# Altium PCB QI9-2605-A01.PcbDoc
Units mm, origin at the board's own origin, x right, y up, seen from the top; angles counter-clockwise.
Board outline 152.4 x 101.6 mm, 2 copper layers (Top Layer, Bottom Layer); 196 components, 142 nets, 676 pads, 0 vias.
Unrouted connection lines stored in the file: 467.
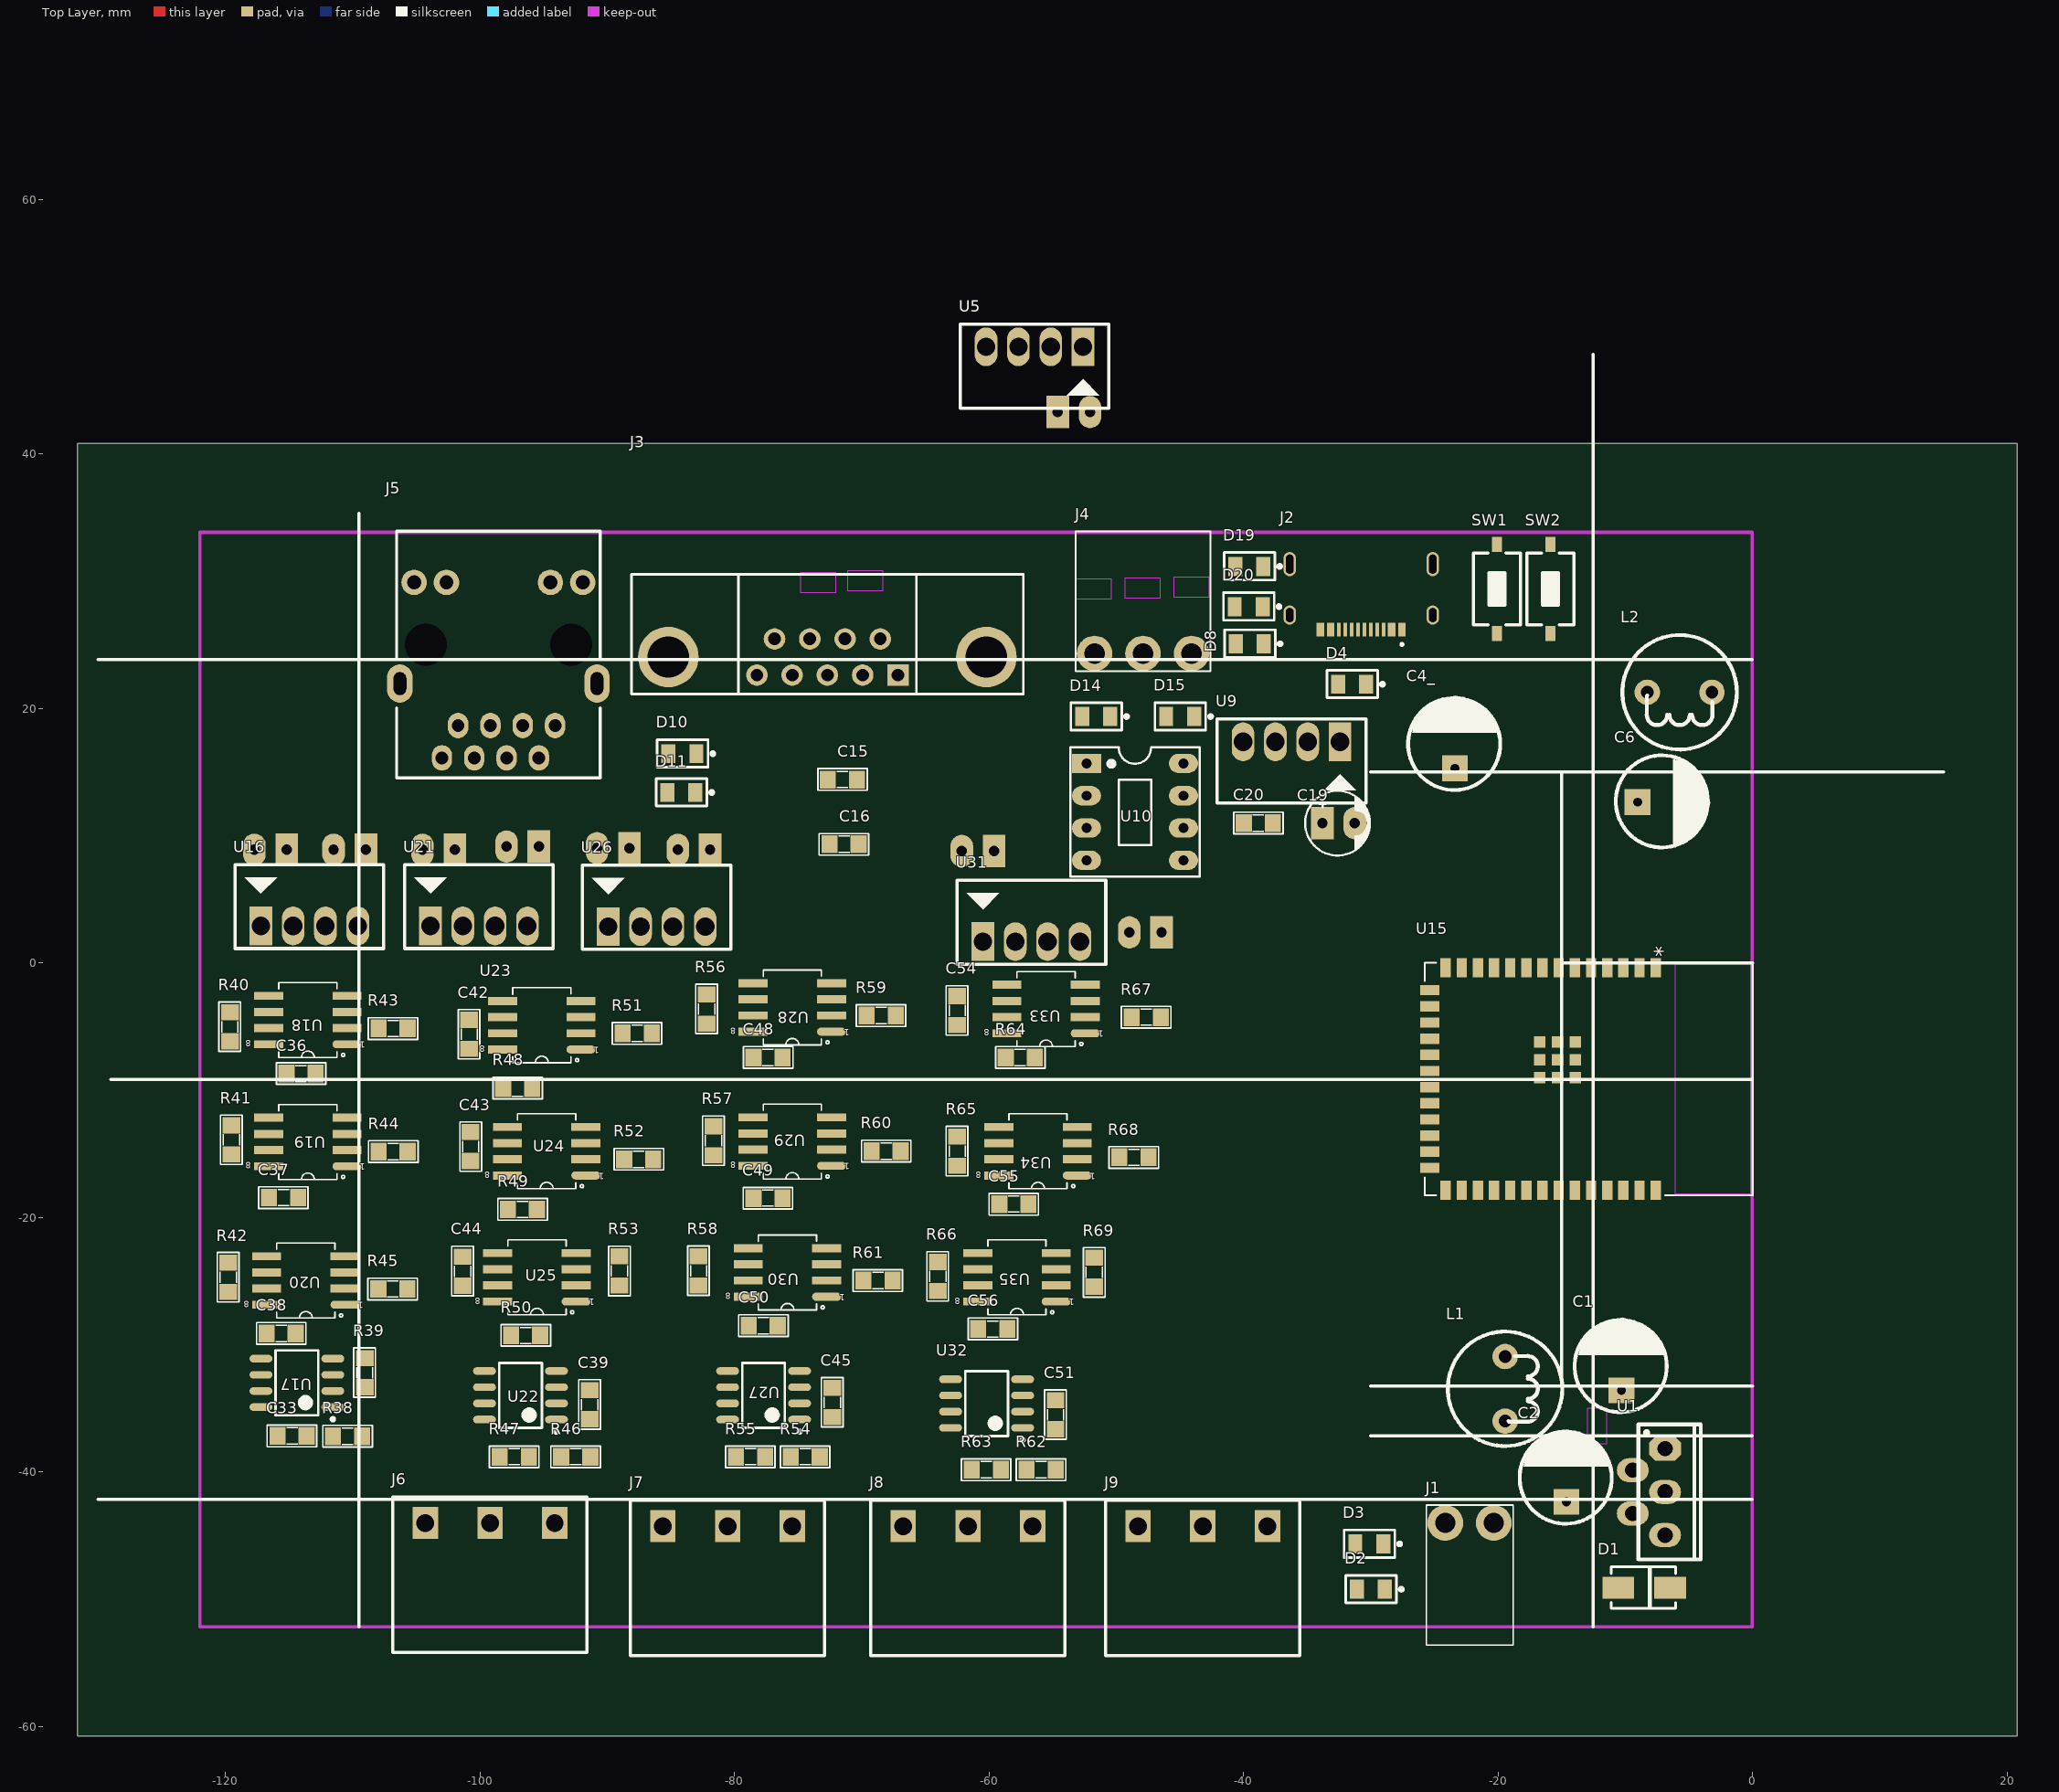
[diagram p0: Top Layer view]
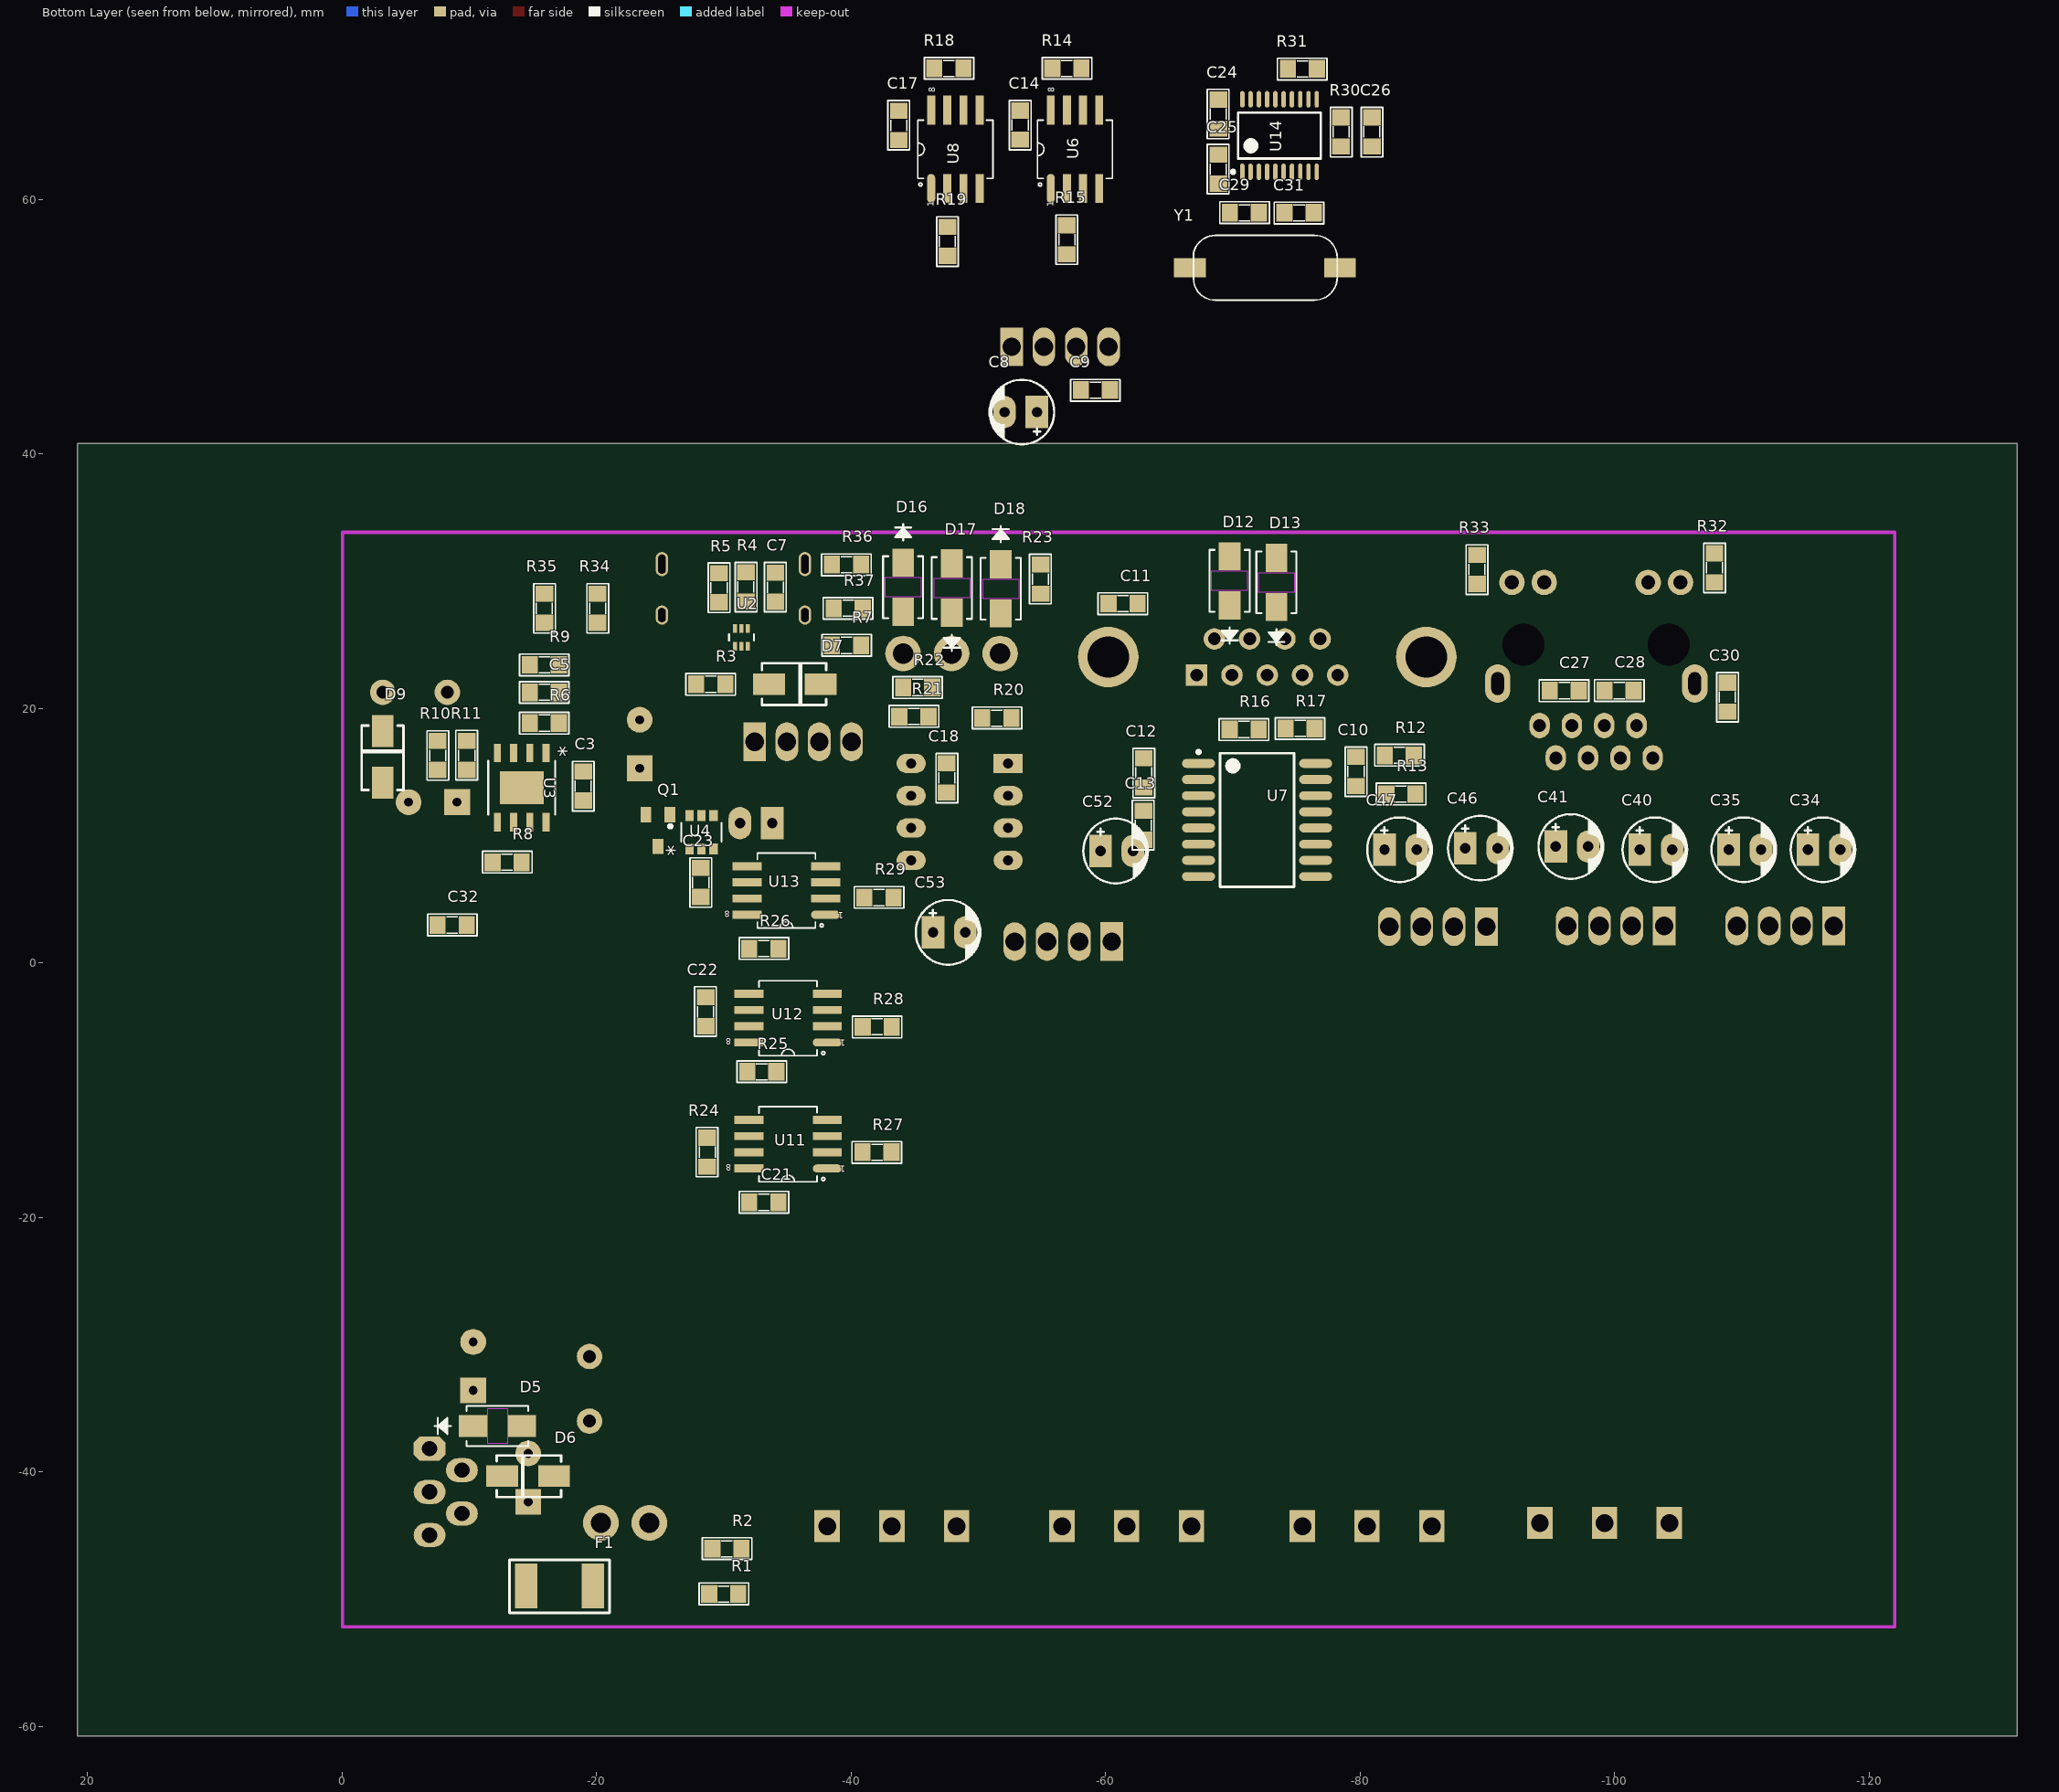
[diagram p1: Bottom Layer view, seen from below]

## Layer stack, top to bottom
Top Solder: solder mask 0.0102, Solder Resist, Dk 3.5
Top Layer: signal copper 0.0356
Dielectric 1: dielectric 0.32, FR-4, Dk 4.8
Bottom Layer: signal copper 0.0356
Bottom Solder: solder mask 0.0102, Solder Resist, Dk 3.5

## Board outline
-131.621,-60.763 20.779,-60.763 20.779,40.837 -131.621,40.837

## Design rules (kind name [scope] priority, off if disabled: settings)
Clearance [All] p1: gap=0.254 ignorepadtopadclearanceinfootprint=FALSE
PolygonConnect [All] p1: connectstyle=Relief reliefconductorwidth=0.254 reliefentries=4 polygonreliefangle="90 Angle" airgapwidth=0.254
RoutingVias [All] p1: holewidth=0.711 width=1.27 viastyle="Through Hole" minholewidth=0.711 minwidth=1.27 maxholewidth=0.711 maxwidth=1.27
SolderMaskExpansion [All] p1: expansion=0 istentingtop=FALSE
SupplyNets "Schematic Supply Nets_17" [InNet('VBUS')] p1: voltage=0.000
SupplyNets "Schematic Supply Nets_16" [InNet('GND2')] p2: voltage=0.000
SupplyNets "Schematic Supply Nets_15" [InNet('GND_RS232')] p3: voltage=0.000
SupplyNets "Schematic Supply Nets_14" [InNet('GND1')] p4: voltage=0.000
SupplyNets "Schematic Supply Nets_13" [InNet('5VP')] p5: voltage=0.000
SupplyNets "Schematic Supply Nets_12" [InNet('VCC1')] p6: voltage=0.000
SupplyNets "Schematic Supply Nets_11" [InNet('GND3')] p7: voltage=0.000
SupplyNets "Schematic Supply Nets_10" [InNet('5V_RS232')] p8: voltage=0.000
SupplyNets "Schematic Supply Nets_9" [InNet('GND_RS485')] p9: voltage=0.000
SupplyNets "Schematic Supply Nets_8" [InNet('VCC2')] p10: voltage=0.000
SupplyNets "Schematic Supply Nets_7" [InNet('3.3V')] p11: voltage=0.000
SupplyNets "Schematic Supply Nets_6" [InNet('GND4')] p12: voltage=0.000
SupplyNets "Schematic Supply Nets_5" [InNet('GND')] p13: voltage=0.000
SupplyNets "Schematic Supply Nets_4" [InNet('VCC3')] p14: voltage=0.000
SupplyNets "Schematic Supply Nets_3" [InNet('VCC4')] p15: voltage=0.000
SupplyNets "Schematic Supply Nets_2" [InNet('5V_RS485')] p16: voltage=0.000
SupplyNets "Schematic Supply Nets_1" [InNet('5V')] p17: voltage=0.000
SupplyNets "Schematic Supply Nets" [InNet('24V')] p18: voltage=0.000
Width [All] p1: maxlimit=0.254 minlimit=0.254 preferedwidth=0.254
30 further rules are at their usual default settings.

## Components (designator, comment, footprint, x,y, rotation, side; value= is the part's Value field where it differs from the comment)
C1 "Cap2" C2 -10.308,-33.6 r180 top value=220uF/50V
C2 "" c2 -14.626,-42.363 r180 top value=220uF,16V
C3 "Cap" 0805 -18.944,13.898 r90 bottom value=104
C4_ "Cap2" C2 -23.389,15.295 r180 top value=220uF/50V
C5 "Cap" 0805 -15.896,21.264 r180 bottom value=220
C6 "Cap2" C2 -9.038,12.628 r90 top value=220uF/50V
C7 "Cap" 0805 -34.057,29.519 r270 bottom value=4.7nF
C8 "Cap" CP1/2 -54.603,43.285 r0 bottom value=4.7uF
C9 "Cap" 0805 -59.203,45.013 r180 bottom value=22uF
C10 "Cap" 0805 -79.67,15.037 r90 bottom value=104
C11 "Cap" 0805 -61.369,28.233 r180 bottom value=4.7nF
C12 "Cap" 0805 -62.999,14.926 r90 bottom value=22uF
C13 "Cap" 0805 -62.972,10.816 r270 bottom value=22uF
C14 "Cap" 0805 -53.285,65.841 r90 bottom value=104
C15 "Cap" 0805 -71.522,14.406 r180 top value=22uF
C16 "Cap" 0805 -71.395,9.326 r0 top value=22uF
C17 "Cap" 0805 -43.75,65.815 r270 bottom value=104
C18 "Cap" 0805 -47.519,14.533 r90 bottom value=104
C19 "Cap" CP1/2 -33.803,10.977 r0 top value=4.7uF
C20 "Cap" 0805 -38.841,10.977 r180 top value=22uF
C21 "Cap" 0805 -33.143,-18.823 r0 bottom value=104
C22 "Cap" 0805 -28.571,-3.837 r270 bottom value=104
C23 "Cap" 0805 -28.19,6.323 r90 bottom value=104
C24 "Cap" 0805 -68.855,66.692 r270 bottom value=104
C25 "Cap" 0805 -68.855,62.374 r270 bottom value=104
C26 "Cap" 0805 -80.92,65.295 r90 bottom value=104
C27 "Cap" 0805 -96.033,21.391 r180 bottom value=1nF
C28 "Cap" 0805 -100.351,21.391 r0 bottom value=1nF
C29 "Cap" 0805 -70.907,58.945 r0 bottom value=22pF
C30 "Cap" 0805 -108.86,20.883 r90 bottom value=4.7nF
C31 "Cap" 0805 -75.205,58.945 r180 bottom value=22pF
C32 "Cap" 0805 -8.657,2.976 r0 bottom value=104
C33 "Cap" 0805 -114.769,-37.165 r0 top value=104
C34 "Cap" CP1/2 -115.189,8.89 r180 bottom value=4.7uF
C35 "Cap" CP1/2 -108.966,8.89 r180 bottom value=10uF
C36 "Cap" 0805 -114.067,-8.708 r180 top value=104
C37 "Cap" 0805 -115.439,-18.445 r0 top value=104
C38 "Cap" 0805 -115.631,-29.123 r180 top value=104
C39 "Cap" 0805 -91.385,-34.717 r270 top value=104
C40 "Cap" CP1/2 -101.981,8.89 r180 bottom value=4.7uF
C41 "Cap" CP1/2 -95.377,9.144 r180 bottom value=10uF
C42 "Cap" 0805 -100.85,-5.62 r270 top value=104
C43 "Cap" 0805 -100.742,-14.427 r90 top value=104
C44 "Cap" 0805 -101.364,-24.228 r270 top value=104
C45 "Cap" 0805 -72.317,-34.547 r270 top value=104
C46 "Cap" CP1/2 -88.265,9.017 r180 bottom value=4.7uF
C47 "Cap" CP1/2 -81.915,8.89 r180 bottom value=10uF
C48 "Cap" 0805 -77.364,-7.438 r180 top value=104
C49 "Cap" 0805 -77.364,-18.487 r0 top value=104
C50 "Cap" 0805 -77.745,-28.52 r180 top value=104
C51 "Cap" 0805 -54.774,-35.507 r270 top value=104
C52 "Cap" CP1/2 -59.603,8.789 r180 bottom value=4.7uF
C53 "Cap" CP1/2 -46.442,2.395 r180 bottom value=10uF
C54 "Cap" 0805 -62.505,-3.755 r270 top value=104
C55 "Cap" 0805 -58.05,-18.957 r0 top value=104
C56 "Cap" 0805 -59.711,-28.774 r180 top value=104
D1 "1N5822" DIODE_DO214AC_SMA -8.517,-49.104 r0 top
D2 "LED" LED_0805_RED -29.993,-49.221 r0 top
D3 "LED" LED_0805_RED -30.12,-45.665 r0 top
D4 "LED" LED_0805_RED -31.474,21.899 r0 top
D5 "SMAJ30CA" SMA_STM -12.213,-36.394 r180 bottom value=SMAJ30A
D6 "1N5822" DIODE_DO214AC_SMA -14.626,-40.331 r0 bottom
D7 "1N5822" DIODE_DO214AC_SMA -35.581,21.899 r180 bottom
D8 "LED" LED_0805_RED -39.518,25.074 r0 top
D9 "1N5822" DIODE_DO214AC_SMA -3.196,16.184 r90 bottom
D10 "LED" LED_0805_RED -84.095,16.438 r0 top
D11 "LED" LED_0805_RED -84.179,13.39 r0 top
D12 "SMAJ15CA" SMA_STM -69.744,30.027 r90 bottom value=SMAJ30A
D13 "SMAJ15CA" SMA_STM -73.427,29.9 r90 bottom value=SMAJ30A
D14 "LED" LED_0805_RED -51.583,19.359 r0 top
D15 "LED" LED_0805_RED -44.979,19.359 r0 top
D16 "SMAJ9CA" SMA_STM -44.09,29.522 r270 bottom value=SMAJ30A
D17 "SMAJ9CA" SMA_STM -47.921,29.456 r90 bottom value=SMAJ30A
D18 "SMAJ9CA" SMA_STM -51.765,29.392 r270 bottom value=SMAJ30A
D19 "LED" LED_0805_RED -39.552,31.154 r0 top
D20 "LED" LED_0805_RED -39.602,27.995 r0 top
F1 "3A" FUSE_1812(4532) -17.091,-48.967 r0 bottom
J1 "KF-3.810-2R" KF2-3.81 -24.151,-44.014 r0 top
J2 "UJ20-C-H-G-MSMT-4-P16-TR" UJ20-C-H-G-MSMT-4-P16 -30.755,28.757 r180 top
J3 "D Connector 9" DSUB1.385-2H9 -72.701,24.035 r270 top
J4 "KF-3.81-3R" KF3-3.81 -44.09,24.312 r180 top
J5 "HR911105A" HR911105A -98.552,25 r0 top
J6 "2EDG5.08-3P" "CON 3 3EDG5.08" -94.128,-44.014 r180 top
J7 "2EDG5.08-3P" "CON 3 3EDG5.08" -75.459,-44.268 r180 top
J8 "2EDG5.08-3P" "CON 3 3EDG5.08" -56.574,-44.268 r180 top
J9 "2EDG5.08-3P" "CON 3 3EDG5.08" -38.121,-44.268 r180 top
L1 "Inductor" L1A -19.452,-30.933 r270 top value=33uH
L2 "Inductor" L1A -3.196,21.264 r180 top value=10uH
Q1 "A0347A" SOT23_ -24.818,10.395 r0 bottom
R1 "Res1" SM-RES-0805 -31.136,-49.602 r0 bottom value=2K2
R2 "Res1" SM-RES-0805 -31.39,-46.046 r0 bottom value=330
R3 "Res1" SM-RES-0805 -27.834,21.899 r180 bottom value=360
R4 "Res1" SM-RES-0805 -31.732,28.401 r90 bottom value=5K1
R5 "Res1" SM-RES-0805 -29.62,28.347 r90 bottom value=5K1
R6 "Res1" SM-RES-0805 -14.753,18.851 r180 bottom value=5K1
R7 "Res1" SM-RES-0805 -40.788,24.947 r0 bottom value=360
R8 "Res1" SM-RES-0805 -14.118,7.901 r0 bottom value=200K
R9 "Res1" SM-RES-0805 -14.753,23.423 r180 bottom value=68K
R10 "Res1" SM-RES-0805 -7.514,15.168 r90 bottom value=5K1
R11 "Res1" SM-RES-0805 -9.8,17.454 r270 bottom value=1K6
R12 "Res1" SM-RES-0805 -84.222,16.311 r0 bottom value=360
R13 "Res1" SM-RES-0805 -84.349,13.263 r0 bottom value=360
R14 "Res1" SM-RES-0805 -58.102,70.286 r0 bottom value=5k1
R15 "Res1" SM-RES-0805 -56.959,57.967 r270 bottom value=220
R16 "Res1" SM-RES-0805 -69.744,18.343 r180 bottom value=0
R17 "Res1" SM-RES-0805 -74.146,18.425 r180 bottom value=0
R18 "Res1" SM-RES-0805 -48.831,70.286 r0 bottom value=5k1
R19 "Res1" SM-RES-0805 -47.561,55.554 r90 bottom value=360
R20 "Res1" SM-RES-0805 -52.599,19.232 r0 bottom value=360
R21 "Res1" SM-RES-0805 -46.079,19.359 r0 bottom value=360
R22 "Res1" SM-RES-0805 -44.09,21.645 r180 bottom value=0
R23 "Res1" SM-RES-0805 -54.885,31.297 r270 bottom value=0
R24 "Res1" SM-RES-0805 -28.698,-13.743 r270 bottom value=5k1
R25 "Res1" SM-RES-0805 -34.123,-8.566 r0 bottom value=5k1
R26 "Res1" SM-RES-0805 -34.286,1.116 r0 bottom value=5k1
R27 "Res1" SM-RES-0805 -40.89,-14.886 r180 bottom value=220
R28 "Res1" SM-RES-0805 -40.915,-5.025 r180 bottom value=220
R29 "Res1" SM-RES-0805 -43.328,5.135 r0 bottom value=360
R30 "Res1" SM-RES-0805 -78.507,64.152 r90 bottom value=0
R31 "Res1" SM-RES-0805 -74.316,70.248 r180 bottom value=5K1
R32 "Res1" SM-RES-0805 -107.844,29.9 r90 bottom value=220
R33 "Res1" SM-RES-0805 -89.175,29.773 r90 bottom value=220
R34 "Res1" SM-RES-0805 -20.087,26.725 r90 bottom value=5k1
R35 "Res1" SM-RES-0805 -15.896,26.725 r90 bottom value=5k1
R36 "Res1" SM-RES-0805 -38.502,31.297 r180 bottom value=220
R37 "Res1" SM-RES-0805 -38.629,27.868 r180 bottom value=220
R38 "Res1" SM-RES-0805 -109.271,-37.203 r180 top value=5k1
R39 "Res1" SM-RES-0805 -109.058,-31.061 r270 top value=5k1
R40 "Res1" SM-RES-0805 -119.655,-3.882 r270 top value=5k1
R41 "Res1" SM-RES-0805 -119.528,-12.772 r270 top value=5k1
R42 "Res1" SM-RES-0805 -119.782,-23.567 r270 top value=5k1
R43 "Res1" SM-RES-0805 -107.971,-5.152 r0 top value=360
R44 "Res1" SM-RES-0805 -105.685,-14.838 r180 top value=360
R45 "Res1" SM-RES-0805 -107.993,-25.624 r0 top value=360
R46 "Res1" SM-RES-0805 -93.62,-38.807 r0 top value=5k1
R47 "Res1" SM-RES-0805 -98.446,-38.807 r0 top value=5k1
R48 "Res1" SM-RES-0805 -95.906,-9.851 r180 top value=5k1
R49 "Res1" SM-RES-0805 -95.525,-19.376 r180 top value=5k1
R50 "Res1" SM-RES-0805 -95.271,-29.282 r180 top value=5k1
R51 "Res1" SM-RES-0805 -88.794,-5.533 r0 top value=360
R52 "Res1" SM-RES-0805 -86.381,-15.439 r180 top value=360
R53 "Res1" SM-RES-0805 -89.048,-25.345 r90 top value=360
R54 "Res1" SM-RES-0805 -75.586,-38.807 r0 top value=5k1
R55 "Res1" SM-RES-0805 -79.889,-38.807 r0 top value=5k1
R56 "Res1" SM-RES-0805 -82.19,-2.485 r270 top value=5k1
R57 "Res1" SM-RES-0805 -81.649,-12.845 r270 top value=5k1
R58 "Res1" SM-RES-0805 -82.825,-23.059 r270 top value=5k1
R59 "Res1" SM-RES-0805 -69.617,-4.136 r0 top value=360
R60 "Res1" SM-RES-0805 -66.95,-14.804 r180 top value=360
R61 "Res1" SM-RES-0805 -69.871,-24.964 r0 top value=360
R62 "Res1" SM-RES-0805 -57.044,-39.823 r0 top value=5k1
R63 "Res1" SM-RES-0805 -61.362,-39.823 r0 top value=5k1
R64 "Res1" SM-RES-0805 -56.409,-7.438 r180 top value=5k1
R65 "Res1" SM-RES-0805 -62.505,-13.661 r270 top value=5k1
R66 "Res1" SM-RES-0805 -64.025,-23.504 r270 top value=5k1
R67 "Res1" SM-RES-0805 -48.789,-4.263 r0 top value=360
R68 "Res1" SM-RES-0805 -49.759,-15.279 r0 top value=360
R69 "Res1" SM-RES-0805 -51.746,-25.452 r90 top value=360
SW1 "SW-SMD" SW-SMD -20.087,29.392 r270 top
SW2 "SW-SMD" SW-SMD -15.896,29.392 r90 top
U1 "LM2576HVT-5.0" T05 -6.879,-38.172 r270 top
U2 "USBLC6-2P6" SOT-666_STM -31.39,25.582 r270 bottom
U3 "MP1584EN-LF-Z" SOIC8E_MPS -14.118,13.771 r270 bottom
U4 "LTC4412ES6#TRMPBF" SOT-6_S_LIT -28.247,10.268 r90 bottom
U5 "B0505S" B0505S -52.614,48.414 r180 top
U6 "HCPL-0600" SOIC8_50_328_25X90_SMT -57.594,63.936 r90 bottom
U7 "SP232" soic16_m -71.903,11.231 r180 bottom
U8 "HCPL-0600" SOIC8_50_328_25X90_SMT -48.196,63.936 r90 bottom
U9 "B0505S" B0505S -32.419,17.375 r180 top
U10 "MAX485" DIP8 -48.535,11.993 r270 top
U11 "HCPL-0600" SOIC8_50_328_25X90_SMT -35.048,-14.251 r0 bottom
U12 "HCPL-0600" SOIC8_50_328_25X90_SMT -35.048,-4.345 r0 bottom
U13 "HCPL-0600" SOIC8_50_328_25X90_SMT -34.921,5.688 r0 bottom
U14 "CH9121t" tssop20 -73.666,65.013 r90 bottom
U15 "ESP32-S3-WROOM-1-N8" ESP32-S3-WROOM-1_EXP -12.878,-9.131 r270 top
U16 "B0505S" B0505S -117.225,2.902 r0 top
U17 "MCP3201" SO8 -114.389,-33.009 r180 top
U18 "HCPL-0600" SOIC8_50_328_25X90_SMT -113.525,-4.492 r180 top
U19 "HCPL-0600" SOIC8_50_328_25X90_SMT -113.525,-14.076 r180 top
U20 "HCPL-0600" SOIC8_50_328_25X90_SMT -113.686,-24.964 r180 top
U21 "B0505S" B0505S -103.892,2.902 r0 top
U22 "MCP3201" SO8 -96.816,-33.984 r180 top
U23 "HCPL-0600" SOIC8_50_328_25X90_SMT -95.144,-4.898 r180 top
U24 "HCPL-0600" SOIC8_50_328_25X90_SMT -94.763,-14.804 r180 top
U25 "HCPL-0600" SOIC8_50_328_25X90_SMT -95.525,-24.71 r180 top
U26 "B0505S" B0505S -89.922,2.849 r0 top
U27 "MCP3201" SO8 -77.717,-33.984 r180 top
U28 "HCPL-0600" SOIC8_50_328_25X90_SMT -75.459,-3.501 r180 top
U29 "HCPL-0600" SOIC8_50_328_25X90_SMT -75.459,-14.042 r180 top
U30 "HCPL-0600" SOIC8_50_328_25X90_SMT -75.84,-24.329 r180 top
U31 "B0505S" B0505S -60.478,1.671 r0 top
U32 "MCP3201" SO8 -60.191,-34.631 r180 top
U33 "HCPL-0600" SOIC8_50_328_25X90_SMT -55.52,-3.628 r180 top
U34 "HCPL-0600" SOIC8_50_328_25X90_SMT -56.155,-14.804 r180 top
U35 "HCPL-0600" SOIC8_50_328_25X90_SMT -57.806,-24.71 r180 top
Y1 "25 MHZ" Crystal.smd_N -70.125,54.627 r90 bottom

## Footprints (in the part's own frame and the unit in brackets; to place one, negate y for a bottom-side part, rotate by r counter-clockwise, add the part's x,y. Pads: shape width x height; smd on the part's side, far side on the other; paste and mask are expansions set on the pad)
0805 [mil] "Compoment SMD 80x50mil"
  rect 50x55 smd: 1(-45,0) 2(45,0)
  silkscreen extent -77,-34 76,33, body extent -40,-27 40,23, height 24
B0505S [mil]
  rect 70x120 hole 57: 1(0,0)
  oval 70x120 hole 57: 2(100,0) 3(200,0) 4(300,0)
  silkscreen extent -80,-70 380,190, body extent -76,-50 376,186, height 394
C2 [mil]
  rect 80x80 hole 27.56: 1(0,0)
  round 80 hole 27.56: 2(0,-150)
  silkscreen extent -140,-225 145,67
c2 [mil]
  rect 80x80 hole 27.56: 1(0,0)
  round 80 hole 27.56: 2(0,-150)
  silkscreen extent -140,-225 145,67
"CON 3 3EDG5.08" [mm]
  rect 2x2.5 hole 1.4: 1(0,0) 2(5.08,0) 3(10.173,0)
  silkscreen extent -2.54,-2.03 12.71,10.16, body extent -2.5,-1.75 12.67,10.25, height 3.15
CP1/2 [mil] "Tu hoa < 22uF/16>50V"
  rect 70x100 hole 32: 1(0,0)
  oval 70x100 hole 32: 2(100,0)
  silkscreen extent -53,-100 147,100, body extent -49,-99 149,99, height 287
Crystal.smd_N [mm] "HC49USxx package"
  rect 1.5x2.5 smd: 1(0,3.5) 2(0,-8.3)
  silkscreen extent -2.55,-8.08 2.55,3.22, body extent -2.29,-8.11 2.36,3.24, height 4
DIODE_DO214AC_SMA [mm] "Diode 2214AC- SMA type"
  rect 2.5x1.7 smd: 1(-2.032,0) 2(2.032,0)
  silkscreen extent -2.59,-1.63 2.46,1.7, body extent -2.53,-1.35 2.47,1.35, height 2.25
DIP8 [mil] "DIP, 8-Leads, Row Spacing 7.62mm, Pitch 2.54mm, Body 9.91x6.73mm"
  rect 60x90 hole 31: 1(-145,-150)
  oval 60x90 hole 31: 2(-45,-150) 3(55,-150) 4(155,-150) 5(155,150) 6(55,150) 7(-45,150) 8(-145,150)
  silkscreen extent -195,-200 205,200, body extent -213,-153 213,153, height 177
DSUB1.385-2H9 [mm] "Connector; D Subminiature; 9 Position; Right Angle; Pitch 1.385 mm"
  rect 1.69x1.69 hole 1: 1(1.42,5.54)
  round 1.69 hole 1: 2(1.42,2.77) 3(1.42,0) 4(1.42,-2.77) 5(1.42,-5.54) 6(-1.42,4.155) 7(-1.42,1.385) 8(-1.42,-1.385) 9(-1.42,-4.155)
  round 4.76 hole 3.26: 10(0,-12.495) 11(0,12.495)
  silkscreen extent -6.5,-15.4 2.9,15.4, body extent -15.62,-15.43 3.58,15.38, height 12.52
ESP32-S3-WROOM-1_EXP [mil]
  rect 59x32 smd paste+0 mask+0: 1(-344.49,207.09) 2(-344.49,157.09) 3(-344.49,107.09) 4(-344.49,57.09) 5(-344.49,7.09) 6(-344.49,-42.91) 7(-344.49,-92.91) 8(-344.49,-142.91) 9(-344.49,-192.91) 10(-344.49,-242.91) 11(-344.49,-292.91) 12(-344.49,-342.91) 13(-344.49,-392.91) 14(-344.49,-442.91) 27(344.49,-442.91) 28(344.49,-392.91) 29(344.49,-342.91) 30(344.49,-292.91) 31(344.49,-242.91) 32(344.49,-192.91) 33(344.49,-142.91) 34(344.49,-92.91) 35(344.49,-42.91) 36(344.49,7.09) 37(344.49,57.09) 38(344.49,107.09) 39(344.49,157.09) 40(344.49,207.09)
  rect 32x59 smd paste+0 mask+0: 15(-275,-492.13) 16(-225,-492.13) 17(-175,-492.13) 18(-125,-492.13) 19(-75,-492.13) 20(-25,-492.13) 21(25,-492.13) 22(75,-492.13) 23(125,-492.13) 24(175,-492.13) 25(225,-492.13) 26(275,-492.13)
  rect 35x35 smd paste+0 mask+0: 41(-59.06,-96.85) 42(-114.17,-41.73) 43(-114.17,-96.85) 44(-114.17,-151.97) 45(-59.06,-151.97) 46(-3.94,-151.97) 47(-3.94,-96.85) 48(-3.94,-41.73) 49(-59.06,-41.73)
  Top Layer keep-out region: 354.5,502 -354.5,502 -354.5,266 354.5,266
  silkscreen extent -360,-507 360,507
FUSE_1812(4532) [mm]
  rect 1.78x3.5 smd: 1(-2.615,0) 2(2.615,0)
  silkscreen extent -3.94,-2.06 3.94,2.11, body extent -2.43,-1.61 2.39,1.61, height 1.32
HR911105A [mm] "Hanrun HR911105A RJ-45 Connector"
  round 1 hole 3.3 unplated paste-2539.97 mask+0.15: 0(-5.715,0) 0(5.715,0)
  oval 1.6x2 hole 1 paste-2539.97 mask+0.15: 1(4.45,-6.35) 2(3.18,-8.89) 3(1.91,-6.35) 4(0.64,-8.89) 5(-0.63,-6.35) 6(-1.9,-8.89) 7(-3.17,-6.35) 8(-4.44,-8.89)
  round 2 hole 1.1 paste-2539.97 mask+0.15: 9(6.625,4.9) 10(4.085,4.9) 11(-4.085,4.9) 12(-6.625,4.9)
  oval 2x3 hole 1 slot 1.8 at 90 deg paste-2539.97 mask+0.15: 13(7.745,-3.05) 14(-7.745,-3.05)
  silkscreen extent -8,-10.48 8,8.92, body extent -7.94,-10.48 7.94,10.92, height 13.6
KF2-3.81 [mm] "3,81mm - modular - blue - Horizontal wire entry - Pressure clamp - 10mm height - 03p"
  round 2.8 hole 1.6: 1(0,0) 2(3.81,0)
  silkscreen extent -1.49,-9.6 5.33,1.4
KF3-3.81 [mm] "3,81mm - modular - blue - Horizontal wire entry - Pressure clamp - 10mm height - 03p"
  round 2.8 hole 1.6: 1(0,0) 2(3.81,0) 3(7.62,0)
  silkscreen extent -1.49,-9.6 9.12,1.4
L1A [mm]
  round 2 hole 1: 1(0,0) 2(5.08,0)
  silkscreen extent -1.96,-4.5 7.04,4.5
LED_0805_RED [mm] "LED SMD; Body 2.0 x 1.3 mm (LxW typ)"
  rect 1.1x1.5 smd: 1(-1.1,0) 2(1.1,0)
  silkscreen extent -1.98,-1.07 2.52,1.09, body extent -1.01,-0.62 1.01,0.63, height 1.1
SM-RES-0805 [mil]
  rect 50x55 smd: 1(0,0) 2(90,0)
  silkscreen extent -32,-34 121,33, body extent 6,-25 84,25, height 31
SMA_STM [mil]
  rect 87x67 smd paste+0 mask+0: 1(-76,0) 2(76,0)
  Top Layer keep-out region: -30.5,-55 -30.5,55 30.5,55 30.5,-55
  Keep-Out Layer region: -30.5,-55 -30.5,55 30.5,55 30.5,-55
  silkscreen extent -194,-62 96,62, body extent -106,-57 106,57, height 104
SO8 [mm] "SOIC, 8-Leads, Body 4.9x3.9mm, Pitch 1.27mm, IPC High Density"
  oval 1.8x0.6 smd: 1(-2.825,1.905) 2(-2.825,0.635) 3(-2.825,-0.635) 4(-2.825,-1.905) 5(2.825,-1.905) 6(2.825,-0.635) 7(2.825,0.635) 8(2.825,1.905)
  silkscreen extent -2.95,-2.55 1.68,2.98, body extent -2.99,-2.45 3,2.45, height 1.6
SOIC8_50_328_25X90_SMT [mil] "SOIC"
  oval 90x25 smd mask+3: 1(-121.32,75)
  rect 90x25 smd mask+3: 2(-121.32,25) 3(-121.32,-25) 4(-121.32,-75) 5(121.32,-75) 6(121.32,-25) 7(121.32,25) 8(121.32,75)
  silkscreen extent -114,-116 90,116, body extent -121,-98 121,98, height 79
SOIC8E_MPS [mil]
  rect 57.5x22 smd paste+0 mask+0: 1(-107.25,75) 2(-107.25,25) 3(-107.25,-25) 4(-107.25,-75) 5(107.25,-75) 6(107.25,-25) 7(107.25,25) 8(107.25,75)
  rect 101x136 smd paste-67.5 mask+0: EPAD(0,0)
  silkscreen extent -84,-104 84,104, body extent -122,-99 122,99, height 67
soic16_m [mm] "16-Pin Small Outline Integrated Circuit Package (SOIC16), IPC Low Density"
  oval 2.6x0.7 smd: 1(-4.6,4.445) 2(-4.6,3.175) 3(-4.6,1.905) 4(-4.6,0.635) 5(-4.6,-0.635) 6(-4.6,-1.905) 7(-4.6,-3.175) 8(-4.6,-4.445) 9(4.6,-4.445) 10(4.6,-3.175) 11(4.6,-1.905) 12(4.6,-0.635) 13(4.6,0.635) 14(4.6,1.905) 15(4.6,3.175) 16(4.6,4.445)
  silkscreen extent -4.72,-5.25 2.9,5.47, body extent -3.75,-5.25 3.75,5.25, height 2.65
SOT23_ [mm] "SOT 23B"
  rect 0.85x1.2 smd: 1(-0.95,-1.25) 2(0,1.25) 3(0.94,-1.245)
  silkscreen extent -1.1,-0.46 -0.85,-0.21, body extent -1.5,-1.3 1.5,1.2, height 1.06
SOT-6_S_LIT [mil]
  rect 34.5x26 smd paste+0 mask+0: 1(-51.75,37.4) 2(-51.75,0) 3(-51.75,-37.4) 4(51.75,-37.4) 5(51.75,0) 6(51.75,37.4)
  silkscreen extent -28,-62 28,62, body extent -55,-57 55,57, height 39
SOT-666_STM [mil]
  rect 26.87x13 smd paste+0 mask+0: 1(-27.94,19.68) 2(-27.94,0) 3(-27.94,-19.69) 4(27.94,-19.69) 5(27.94,0) 6(27.94,19.68)
  silkscreen extent -10,-38 10,38, body extent -34,-34 34,34, height 25
SW-SMD [mm] "Switch SMD type"
  rect 1.2x0.8 smd: 1(-3.5,0) 2(3.5,0)
  silkscreen extent -2.82,-1.85 2.82,1.85, body extent -3.05,-1.85 3.05,1.85, height 2.5
T05 [mm]
  oct 1.9x2.5 hole 1.2: 1(0,0)
  oval 1.9x2.5 hole 1.2: 2(1.7,-2.54) 3(3.4,0) 4(5.1,-2.54) 5(6.8,0)
  silkscreen extent -1.9,-2.1 8.7,2.8, body extent -1.95,-2.15 8.75,2.85, height 19.6
tssop20 [mm] "TSSOP, 20-Leads, Body 6.50x4.40mm, Pitch 0.65mm, IPC High Density"
  oval 1.3x0.35 smd: 1(-2.85,2.925) 2(-2.85,2.275) 3(-2.85,1.625) 4(-2.85,0.975) 5(-2.85,0.325) 6(-2.85,-0.325) 7(-2.85,-0.975) 8(-2.85,-1.625) 9(-2.85,-2.275) 10(-2.85,-2.925) 11(2.85,-2.925) 12(2.85,-2.275) 13(2.85,-1.625) 14(2.85,-0.975) 15(2.85,-0.325) 16(2.85,0.325) 17(2.85,0.975) 18(2.85,1.625) 19(2.85,2.275) 20(2.85,2.925)
  silkscreen extent -2.97,-3.25 1.8,3.78, body extent -3.23,-3.3 3.23,3.3, height 1.25
UJ20-C-H-G-MSMT-4-P16 [mm]
  rect 0.6x1.1 smd paste+0 mask+0.102: A1_B12(-3.2,2.575) A4_B9(-2.4,2.575) B1_A12(3.2,2.575) B4_A9(2.4,2.575)
  rect 0.3x1.1 smd paste+0 mask+0.102: A5(-1.25,2.575) A6(-0.25,2.575) A7(0.25,2.575) A8(1.25,2.575) B5(1.75,2.575) B6(0.75,2.575) B7(-0.75,2.575) B8(-1.75,2.575)
  oval 1x1.5 hole 0.6 slot 1.1 at 90 deg mask+0.102: SH1(-5.62,1.425) SH2(5.62,1.425)
  oval 1x1.9 hole 0.6 slot 1.5 at 90 deg mask+0.102: SH3(-5.62,-2.575) SH4(5.62,-2.575)
  silkscreen extent -3.3,3.63 -3.1,3.82

## Part data
C1 C3 C4_ C5 C6 C7 C8 C9 C10 C11 C12 C13 C14 C15 C16 C17 C18 C19 C20 C21 C22 C23 C24 C25 C26 C27 C28 C29 C30 C31 C32 C33 C34 C35 C36 C37 C38 C39 C40 C41 C42 C43 C44 C45 C46 C47 C48 C49 C50 C51 C52 C53 C54 C55 C56: "Capacitor", Publisher="Altium Limited"
  C1 C4_ C6: PackageReference=CAPR5-4X5, Published=23-Sep-2002
  C3 C5 C7 C8 C9 C10 C11 C12 C13 C14 C15 C16 C17 C18 C19 C20 C21 C22 C23 C24 C25 C26 C27 C28 C29 C30 C31 C32 C33 C34 C35 C36 C37 C38 C39 C40 C41 C42 C43 C44 C45 C46 C47 C48 C49 C50 C51 C52 C53 C54 C55 C56: LatestRevisionDate=17-Jul-2002, LatestRevisionNote="Re-released for DXP Platform.", PackageReference=RAD-0.3, Published=8-Jun-2000
C2: library part "Cap Pol 3mm", "Polarized Capacitor (Axial)", LatestRevisionDate=17-Jul-2002, LatestRevisionNote="Re-released for DXP Platform.", PackageReference=POLAR0.8, Published=8-Jun-2000, Publisher="Altium Limited"
D1 D6 D7 D9: library part "D Schottky", "Schottky Diode", Code_JEDEC=DO-214-AA, LatestRevisionDate=17-Jul-2002, LatestRevisionNote="Re-released for DXP Platform.", PackageReference=SMB, Published=8-Jun-2000, Publisher="Altium Limited"
D2 D3 D4 D8 D10 D11 D14 D15 D19 D20: library part LED0, "Typical INFRARED GaAs LED", LatestRevisionDate=08-Jul-2005, LatestRevisionNote="Mech Layer 1 removed.", PackageReference=LED-0, Published=8-Jun-2000, Publisher="Altium Limited"
D5: "TVS DIODE 30V 48.4V DO214AC", MFR="Littelfuse Inc.", MPN=SMAJ30A, Solder=SMT
D12 D13 D16 D17 D18: library part SMAJ30CA, "TVS DIODE 30V 48.4V DO214AC", MFR="Littelfuse Inc.", MPN=SMAJ30A, Solder=SMT
F1: library part "Fuse 1", "Fuse", LatestRevisionDate=17-Jul-2002, LatestRevisionNote="Re-released for DXP Platform.", PackageReference=PIN-W2/E2.8, Published=8-Jun-2000, Publisher="Altium Limited"
J1: library part "Header 2", "Header, 2-Pin", LatestRevisionDate=17-Jul-2002, LatestRevisionNote="Re-released for DXP Platform.", Publisher="Altium Limited"
J2: Package=None, Availability=Unavailable, MF="{'manufacturer': u'Same Sky (Formerly CUI Devices)'}", MP=UJ20-C-H-G-MSMT-4-P16-TR, Price=None
J3: library part DB9_RA, "Receptacle Assembly, 9 Position, Right Angle", PackageDocument=O, DatasheetDocument=1-Sep-1999, Gender=Receptacle, LatestRevisionDate=17-Jul-2002, LatestRevisionNote="Re-released for DXP Platform.", Orientation="Right Angle", PackageReference=788750, Positions=9, Published=15-Jun-2001, Publisher="Altium Limited"
J4 J6 J7 J8 J9: library part "Header 3", "Header, 3-Pin", LatestRevisionDate=17-Jul-2002, LatestRevisionNote="Re-released for DXP Platform.", Publisher="Altium Limited"
J5: "Hanrun HR911105A RJ-45 Connector", MFR=HanRun, MPN=HR911105A, Solder=WAVE
Q1: library part IRF9540, "HEXFET P-Channel Power MOSFET", ComponentLink1Description="Manufacturer Link", ComponentLink1URL=http://www.irf.com/, ComponentLink2Description=Datasheet, ComponentLink2URL=http://www.irf.com/product-info/datasheets/data/irf9540.pdf, DatasheetVersion=PD-9.421C, LatestRevisionDate=17-Jul-2002, LatestRevisionNote="Re-released for DXP Platform.", Note="Pin 2 is electrically connected to pin 4.", PackageDescription="TO, Thru-Hole, Vertical, Heatsink Mounted; 3 In-Line Leads; Pitch 2.54 mm", PackageReference=TO-220AB, PackageVersion=Feb-1997, Published=8-Jun-2000, Publisher="Altium Limited"
R1 R2 R3 R4 R5 R6 R7 R8 R9 R10 R11 R12 R13 R14 R15 R16 R17 R18 R19 R20 R21 R22 R23 R24 R25 R26 R27 R28 R29 R30 R31 R32 R33 R34 R35 R36 R37 R38 R39 R40 R41 R42 R43 R44 R45 R46 R47 R48 R49 R50 R51 R52 R53 R54 R55 R56 R57 R58 R59 R60 R61 R62 R63 R64 R65 R66 R67 R68 R69: "Resistor", LatestRevisionDate=17-Jul-2002, LatestRevisionNote="Re-released for DXP Platform.", PackageReference=AXIAL-0.3, Published=8-Jun-2000, Publisher="Altium Limited"
SW1 SW2: "Switch", LatestRevisionDate=17-Jul-2002, LatestRevisionNote="Re-released for DXP Platform.", PackageReference=SPST-2, Published=24-Mar-1999, Publisher="Altium Limited"
U1: "SIMPLE SWITCHER; 3A Step-Down Voltage Regulator", DigiKeyPartNumber=LM2576HVT-5.0-ND, Manufacturer="National Semiconductor", PackageTopMarking="NSUZXYTT*LM2576HVT*-5.0 P+", PowerWise=N, Code_JEDEC=TO-220-AB, ComponentLink1Description="LM2576HV Datasheet", ComponentLink1URL=http://www.national.com/ds/LM/LM2576HV.pdf, ComponentLink2Description="LM2576HV Web Page", ComponentLink2URL=http://www.national.com/pf/LM/LM2576HV.html, ComponentLink3Description="T05A Package Page", ComponentLink3URL=http://www.national.com/packaging/folders/t05a.html, CompType=Switcher, DatasheetVersion=Aug-2004, FirstPublished=4-Dec-2008, PackageDescription="TO-220, Molded, 5 Lead, Straight", PackageReference=T05A, PackageVersion="revJ, Jan-1992", PartNumber=LM2576HVT-5.0, PinCount=5, Publisher="Altium Limited", RoHS=O
U2: "ESD Protection for USB 2.0 High Speed", Manufacturer_Name=STMicroelectronics, Copyright="Copyright (C) 2025 Ultra Librarian. All rights reserved.", Manufacturer_Part_Number=USBLC6-2P6, RefDes=RefDes, Type=Type
U3: "<p>3A 1.5MHz 28V Step-Down Converter</p>", Manufacturer_Name="Monolithic Power Systems", Copyright="Copyright (C) 2026 Ultra Librarian. All rights reserved.", Manufacturer_Part_Number=MP1584EN-LF-Z, RefDes=RefDes, Type=Type
U4: library part LTC4412ES6TRMPBF, "Low Loss PowerPathâ„¢ Controller in ThinSOT", Manufacturer_Name="Analog Devices Inc", Copyright="Copyright (C) 2025 Ultra Librarian. All rights reserved.", Manufacturer_Part_Number=LTC4412ES6#TRMPBF, RefDes=RefDes, Type=Type
U5 U9 U16 U21 U26 U31: "Cắm", Chung_Loai=Cắm, Don_Vi=Con, Ma_Hang=MH003143, Ten_Linh_Kien="B0505S-1W SIP4 IC Converter DC-DC"
U6 U8 U11 U12 U13 U18 U19 U20 U23 U24 U25 U28 U29 U30 U33 U34 U35: library part IC_HCPL-3120-500E, "2.5A Gate Driver Optical Coupling 3750Vrms 1 Channel 8-DIP Gull Wing", Alternate Part Number-1=NA, Case/Package=SOIC8, Manufacturer="Broadcom Avago", Manufacturer Part Number=HCPL-3120-500E, Supplier Part Number-1=HCPL-3120-500E, Supplier-1=MOUSER
U7: "Enhanced RS-232 Line Drivers/Receivers", Manufacturer=Sipex, Volt=5V, ComponentLink1Description="Digikey Part Link", ComponentLink2Description="Open Datasheet", ComponentLink2URL=H:\LIBRARY\LIBRARY.Datasheet\, Data Rate (Max)=120kbps, Published=13-April-2009, Publisher="Hoang Nguyen", Vendor=Digikey
U10: "RS232 - RS485 (Same sn75176)"
U14: library part ch9121t_c45354919, "Type:Ethernet Transceiver Number of ports: Ethernet Speed Standards:10BASE-T；100BASE-TX Data Rate:100Mbit/s；10Mbit/s Voltage - Supply:3.2V~3.4V Voltage - Supply:3.2V~3.4V Operating Temperature:-40℃~+85℃ Operating Temperature:-40℃~+85℃ Features:Programmabl", JLCPCB Part Class="Extended Part", LCSC Part Name=网络串口透传芯片, Manufacturer=WCH(南京沁恒), ManufacturerPart=CH9121T, Operating Temperature=-40℃~+85℃, Voltage - Supply=3.2V~3.4V, AddInBom=yes, ConvertToPcb=yes, Data Rate=100Mbit/s；10Mbit/s, Datasheet=https://item.szlcsc.com/datasheet/CH9121T/47444202.html, Ethernet Speed Standards=10BASE-T；100BASE-TX, Features="Programmable LED indication；Power-on reset", FootprintName=TSSOP-20_L6.5-W4.4-P0.65-LS6.4-BL, ModelId=d00c537554e8428abe371c2c4fe2166f, ModelName=TSSOP-20_L6.5-W4.4-H1.0-LS6.4-P0.65, ModelTransform=251.969,255.906,0,90,0,0,0.0005,0,0, Supplier=LCSC, Supplier Footprint=TSSOP-20, SupplierPart=C45354919, Symbol=CH9121T_C45354919, Type="Ethernet Transceiver"
U15: library part ESP32-S3-WROOM-1, "Description", Manufacturer_Name="Espressif Systems", Copyright="Copyright (C) 2026 Ultra Librarian. All rights reserved.", Manufacturer_Part_Number=ESP32-S3-WROOM-1-N8, RefDes=RefDes, Type="Transceiver module"
U17 U22 U27 U32: "12 BIT A/D CONVERTOR", Manufacturer="Microchip Technology", Manufacturer Part Number=MCP3201-CI/SN, Operating Temperature="-40°C ~ 85°C", Package / Case="8-SOIC (3.9mm Width)", Power Dissipation (Max)=-, Supplier Part Number=MCP3201-CI/SN-ND, Voltage Supply Source="Single Supply", Category="Integrated Circuits (ICs)", Data Interface="Serial, SPI™", Mounting Type="Surface Mount", Number of Bits=12, Number of Converters=1, Number of Inputs and Type="1 Single-Ended, Unipolar", Packaging=Tube, RoHS="RoHS Compliant", Sampling Rate (Per Second)=100k, Supplier=Digi-Key, Supplier 1=Digi-Key, Supplier Part Number 1=MCP3201-CI/SN-ND
Y1: library part XTAL, "Crystal Oscillator", LatestRevisionDate=17-Jul-2002, LatestRevisionNote="Re-released for DXP Platform.", PackageReference=R38, Published=8-Jun-2000, Publisher="Altium Limited"
L1 L2: Code_IEC=1005, Code_JEITA=0402, LatestRevisionDate=29-May-2009, LatestRevisionNote="IPC-7351 Footprint Added.", PackageDescription="Chip Inductor", PackageReference=0402-A, Published=8-Jun-2000, Publisher="Altium Limited"

## Nets (pads, with @x,y where several pads share a name; then routed paths per layer and width w, separated by ;. In a path a pad name is that pad's centre, name@x,y a point inside that pad or via, vN(x,y) a via of type N, cw(c..) or ccw(c..) an arc to the next point about the centre after c; other vN are vias at no path point)
3.3V: C6.1 C17.1 C23.1 C24.2 C25.1 C26.2 C32.1 C37.1 C43.1 C49.1 C55.1 D19.1 D20.1 L2.2 R10.2 R15.2 R18.2 R26.2 R27.2 R28.2 R30.2 R31.1 R32.2 R33.2 R34.2 R35.2 R41.2 R43.2 R45.2 R49.2 R51.2 R53.2 R57.2 R59.2 R61.2 R65.2 R67.2 R69.2 U8.7 U8.8 U13.7 U13.8 U14.3 U14.18 U15.2 U19.7 U19.8 U24.7 U24.8 U29.7 U29.8 U34.7 U34.8
5V: C4_.1 C34.1 C40.1 C46.1 C52.1 D7.2 D8.1 Q1.3 R6.2 U3.7 U4.6 U16.2 U21.2 U26.2 U31.2
5V_RS232: C9.2 C10.2 C14.2 C15.2 R12.2 R13.2 R14.2 R19.1 U5.4 U6.7 U6.8 U7.16
5V_RS485: C18.2 C20.2 C21.2 C22.2 R20.2 R21.2 R24.2 R25.2 R29.1 U9.4 U10.8 U11.7 U11.8 U12.7 U12.8
5VP: C2.1 C8.1 C19.1 D3.1 L1.2 Q1.2 U1.4 U4.1 U5.2 U9.2
24V: C1.1 D1.2 D2.1 D5.1 U1.1
ACT: J5.11 U14.7
ADC1_CLK: R40.1 U17.7 U18.6
ADC1_CS: R42.1 U17.5 U20.6
ADC1_DATA: U17.6 U19.3
ADC2_CLK: R48.1 U22.7 U23.6
ADC2_CS: R50.1 U22.5 U25.6
ADC2_DATA: U22.6 U24.3
ADC3_CLK: R56.1 U27.7 U28.6
ADC3_CS: R58.1 U27.5 U30.6
ADC3_DATA: U27.6 U29.3
ADC4_CLK: R64.1 U32.7 U33.6
ADC4_CS: R66.1 U32.5 U35.6
ADC4_DATA: U32.6 U34.3
CH1_CLK: U15.21 U18.3
CH1_CS: U15.23 U20.3
CH1_DATA: R41.1 U15.22 U19.6
CH2_CLK: U15.24 U23.3
CH2_CS: U15.26 U25.3
CH2_DATA: R49.1 U15.25 U24.6
CH3_CLK: U15.31 U28.3
CH3_CS: U15.33 U30.3
CH3_DATA: R57.1 U15.32 U29.6
CH4_CLK: U15.34 U33.3
CH4_CS: U15.38 U35.3
CH4_DATA: R65.1 U15.35 U34.6
D+: U2.4 U15.14
D-: U2.6 U15.13
ESP32_CFG2: R31.2 U14.11 U15.10
ESP32_EN1: U12.3 U15.7
ESP32_RX0: R18.1 U8.6 U15.36
ESP32_RX1: R26.1 U13.6 U15.6
ESP32_RX2: U14.14 U15.8
ESP32_TX0: U6.3 U15.37
ESP32_TX1: U11.3 U15.5
ESP32_TX2: U14.13 U15.9
GND: C1.2 C2.2 C4_.2 C6.2 C7.1 C8.2 C17.2 C19.2 C23.2 C24.1 C25.2 C26.1 C27.1 C28.1 C29.2 C30.1 C31.2 C32.2 C34.2 C37.2 C40.2 C43.2 C46.2 C49.2 C52.2 C55.2 D5.2 D6.1 D9.1 J1.2 J2.A1_B12 J2.B1_A12 J5.8 R1.1 R2.1 R3.1 R4.2 R5.2 R8.2 R9.1 R11.1 SW1.1 SW2.2 U1.3 U1.5 U2.2 U3.5 U4.3 U5.1 U8.5 U9.1 U13.5 U14.17 U15.1 U15.40 U15.41 U15.42 U15.43 U15.44 U15.45 U15.46 U15.47 U15.48 U15.49 U16.1 U19.5 U21.1 U24.5 U26.1 U29.5 U31.1 U34.5
GND1: C33.1 C35.2 C36.1 C38.1 J6.3 R39.1 U16.3 U17.3 U17.4 U18.5 U19.4 U20.5
GND2: C39.1 C41.2 C42.1 C44.1 J7.3 R47.1 U21.3 U22.3 U22.4 U23.5 U24.4 U25.5
GND3: C45.1 C47.2 C48.1 C50.1 J8.3 R55.1 U26.3 U27.3 U27.4 U28.5 U29.4 U30.5
GND4: C51.1 C53.2 C54.1 C56.1 J9.3 R63.1 U31.3 U32.3 U32.4 U33.5 U35.5
GND_RS232: C9.1 C10.1 C11.2 C14.1 C16.1 D12.2 D13.2 J3.5 U5.3 U6.5 U7.15
GND_RS485: C18.1 C20.1 C21.1 C22.1 D16.1 D18.2 J4.3 U9.3 U10.5 U11.5 U12.5
LINK/RESET: J5.10 U14.6
NetC3_1: C3.1 U3.8
NetC3_2: C3.2 D9.2 L2.1 U3.1
NetC5_1: C5.1 U3.3
NetC5_2: C5.2 R9.2
NetC7_2: C7.2 J2.SH1 J2.SH2 J2.SH3 J2.SH4
NetC11_1: C11.1 J3.10 J3.11
NetC12_1: C12.1 U7.3
NetC12_2: C12.2 U7.1
NetC13_1: C13.1 U7.4
NetC13_2: C13.2 U7.5
NetC15_1: C15.1 U7.2
NetC16_2: C16.2 U7.6
NetC27_2: C27.2 J5.4
NetC28_2: C28.2 J5.5
NetC30_2: C30.2 J5.13 J5.14
NetD1_1: D1.1 F1.2
NetD2_2: D2.2 R1.2
NetD3_2: D3.2 R2.2
NetD4_2: D4.2 R3.2
NetD6_2: D6.2 L1.1 U1.2
NetD8_2: D8.2 R7.2
NetD10_1: D10.1 R12.1
NetD11_1: D11.1 R13.1
NetD12_1: D12.1 J3.2 R16.1
NetD13_1: D13.1 J3.3 R17.1
NetD14_1: D14.1 R20.1
NetD15_1: D15.1 R21.1
NetD16_2: D16.2 D17.1 J4.1 R22.1
NetD17_2: D17.2 D18.1 J4.2 R23.1
NetD19_2: D19.2 R36.1
NetD20_2: D20.2 R37.1
NetF1_1: F1.1 J1.1
NetJ2_A5: J2.A5 R5.1
NetJ2_B5: J2.B5 R4.1
NetJ5_9: J5.9 R33.1
NetJ5_12: J5.12 R32.1
NetJ6_1: J6.1 R38.1 R39.2
NetJ6_2: J6.2 U17.2
NetJ7_1: J7.1 R46.1 R47.2
NetJ7_2: J7.2 U22.2
NetJ8_1: J8.1 R54.1 R55.2
NetJ8_2: J8.2 U27.2
NetJ9_1: J9.1 R62.1 R63.2
NetJ9_2: J9.2 U32.2
NetQ1_1: Q1.1 U4.5
NetR6_1: R6.1 U3.2
NetR7_1: R7.1 U4.4
NetR8_1: R8.1 U3.6
NetR10_1: R10.1 R11.2 U3.4
NetR15_1: R15.1 U6.2
NetR16_2: R16.2 U7.14
NetR17_2: R17.2 U7.13
NetR19_2: R19.2 U8.2
NetR22_2: R22.2 U10.7
NetR23_2: R23.2 U10.6
NetR27_1: R27.1 U11.2
NetR28_1: R28.1 U12.2
NetR29_2: R29.2 U13.2
NetR30_1: R30.1 U14.8
NetR34_1: R34.1 SW1.2 U15.27
NetR35_1: R35.1 SW2.1 U15.3
NetR36_2: R36.2 U15.4
NetR37_2: R37.2 U15.39
NetR43_1: R43.1 U18.2
NetR44_2: R44.2 U19.2
NetR45_1: R45.1 U20.2
NetR51_1: R51.1 U23.2
NetR52_2: R52.2 U24.2
NetR53_1: R53.1 U25.2
NetR59_1: R59.1 U28.2
NetR60_2: R60.2 U29.2
NetR61_1: R61.1 U30.2
NetR67_1: R67.1 U33.2
NetR68_2: R68.2 U34.2
NetR69_1: R69.1 U35.2
RXN: J5.6 U14.20
RXP: J5.3 U14.19
TXN: J5.2 U14.2
TXP: J5.1 U14.1
UART_EN1: R25.1 U10.2 U10.3 U12.6
UART_RX0: D10.2 U7.12 U8.3
UART_RX1: D14.2 U10.1 U13.3
UART_TX0: D11.2 R14.1 U6.6 U7.11
UART_TX1: D15.2 R24.1 U10.4 U11.6
USB_D+: J2.A6 J2.B6 U2.3
USB_D-: J2.A7 J2.B7 U2.1
VBUS: D4.1 D7.1 J2.A4_B9 J2.B4_A9 U2.5
VCC1: C33.2 C35.1 C36.2 C38.2 R38.2 R40.2 R42.2 R44.1 U16.4 U17.1 U17.8 U18.7 U18.8 U20.7 U20.8
VCC2: C39.2 C41.1 C42.2 C44.2 R46.2 R48.2 R50.2 U21.4 U22.1 U22.8 U23.7 U23.8 U25.7 U25.8
VCC3: C45.2 C47.1 C48.2 C50.2 R54.2 R56.2 R58.2 U26.4 U27.1 U27.8 U28.7 U28.8 U30.7 U30.8
VCC4: C51.2 C53.1 C54.2 C56.2 R62.2 R64.2 R66.2 U31.4 U32.1 U32.8 U33.7 U33.8 U35.7 U35.8
XI: C29.1 U14.4 Y1.1
XO: C31.1 U14.5 Y1.2
pads on no net: J2.A8 J2.B8 J3.1 J3.4 J3.6 J3.7 J3.8 J3.9 J5.0 J5.7 R52.1 R60.1 R68.1 U3.EPAD U4.2 U6.1 U6.4 U7.7 U7.8 U7.9 U7.10 U8.1 U8.4 U11.1 U11.4 U12.1 U12.4 U13.1 U13.4 U14.9 U14.10 U14.12 U14.15 U14.16 U15.11 U15.12 U15.15 U15.16 U15.17 U15.18 U15.19 U15.20 U15.28 U15.29 U15.30 U18.1 U18.4 U19.1 U20.1 U20.4 U23.1 U23.4 U24.1 U25.1 U25.4 U28.1 U28.4 U29.1 U30.1 U30.4 U33.1 U33.4 U34.1 U34.4 U35.1 U35.4

## Keep-outs
Keep-Out Layer:
  lines w0.254: -122.021,-52.163 -122.021,33.837 -0.021,33.837 -0.021,-52.163 -122.021,-52.163

## Silkscreen, mask and mechanical layers (free items; w line width, h text height)
Top Overlay:
  lines w0.254: -130.021,-42.163 -0.021,-42.163 ; -130.021,23.837 -0.021,23.837 ; -129.021,-9.163 -0.021,-9.163 ; -109.521,-52.163 -109.521,35.337 ; -30.021,-37.163 -0.021,-37.163 ; -30,-33.263 0,-33.263 ; -30,15 15,15 ; -15,-33.263 -15,-18.263 -15,0 ; -15,15 -15,0 ; -12.521,-52.163 -12.521,47.837 ; 0,0 -15,0

## Dimensions
-122.021,-52.163 to -130.021,-42.163 on Top Overlay
-122.021,33.837 to -130.021,23.837 on Top Overlay
-0.021,33.837 to -12.521,47.837 on Top Overlay
-122.021,33.837 to -109.521,35.337 on Top Overlay
-122.021,33.837 to -122.021,-52.163 on Top Overlay
-122.021,33.837 to -0.021,33.837 on Top Overlay

## Text inside footprints (layer, text, board x,y; h text height)
U3: Bottom Overlay "*" at -16.455,17.066 h1.27 r90; Bottom 3D Body "*" at -15.274,15.701 h1.27 r90
U4: Bottom Overlay "*" at -26.763,8.382 h1.27 r270; Bottom 3D Body "*" at -28.145,9.455 h1.27 r270
U6: Bottom Overlay "8" at -55.994,68.381 h0.51 r270; Bottom Overlay "1" at -55.892,59.414 h0.51 r270
U8: Bottom Overlay "8" at -46.596,68.381 h0.51 r270; Bottom Overlay "1" at -46.494,59.414 h0.51 r270
U11: Bottom Overlay "1" at -39.569,-15.953 h0.51 r180; Bottom Overlay "8" at -30.602,-15.851 h0.51 r180
U12: Bottom Overlay "1" at -39.569,-6.047 h0.51 r180; Bottom Overlay "8" at -30.602,-5.945 h0.51 r180
U13: Bottom Overlay "1" at -39.442,3.986 h0.51 r180; Bottom Overlay "8" at -30.475,4.088 h0.51 r180
U15: Top Overlay "*" at -8.253,1.321 h1.27 r270; Top 3D Body "*" at -8.253,-1.448 h1.27 r270
U18: Top Overlay "8" at -117.97,-6.092 h0.51 r180; Top Overlay "1" at -109.004,-6.193 h0.51 r180
U19: Top Overlay "8" at -117.97,-15.676 h0.51 r180; Top Overlay "1" at -109.004,-15.778 h0.51 r180
U20: Top Overlay "8" at -118.131,-26.565 h0.51 r180; Top Overlay "1" at -109.165,-26.666 h0.51 r180
U23: Top Overlay "8" at -99.589,-6.499 h0.51 r180; Top Overlay "1" at -90.623,-6.6 h0.51 r180
U24: Top Overlay "8" at -99.208,-16.405 h0.51 r180; Top Overlay "1" at -90.242,-16.506 h0.51 r180
U25: Top Overlay "8" at -99.97,-26.311 h0.51 r180; Top Overlay "1" at -91.004,-26.412 h0.51 r180
U28: Top Overlay "8" at -79.904,-5.102 h0.51 r180; Top Overlay "1" at -70.938,-5.203 h0.51 r180
U29: Top Overlay "8" at -79.904,-15.643 h0.51 r180; Top Overlay "1" at -70.938,-15.744 h0.51 r180
U30: Top Overlay "8" at -80.285,-25.93 h0.51 r180; Top Overlay "1" at -71.319,-26.031 h0.51 r180
U33: Top Overlay "8" at -59.965,-5.229 h0.51 r180; Top Overlay "1" at -50.999,-5.33 h0.51 r180
U34: Top Overlay "8" at -60.6,-16.405 h0.51 r180; Top Overlay "1" at -51.634,-16.506 h0.51 r180
U35: Top Overlay "8" at -62.251,-26.311 h0.51 r180; Top Overlay "1" at -53.285,-26.412 h0.51 r180